# Altium PCB PCB.PcbDoc
Units mil, origin at the board's own origin, x right, y up, seen from the top; angles counter-clockwise.
Board outline 2040 x 3575 mil, 2 copper layers (Top Layer, Bottom Layer); 45 components, 27 nets, 117 pads, 0 vias.
Unrouted connection lines stored in the file: 90.
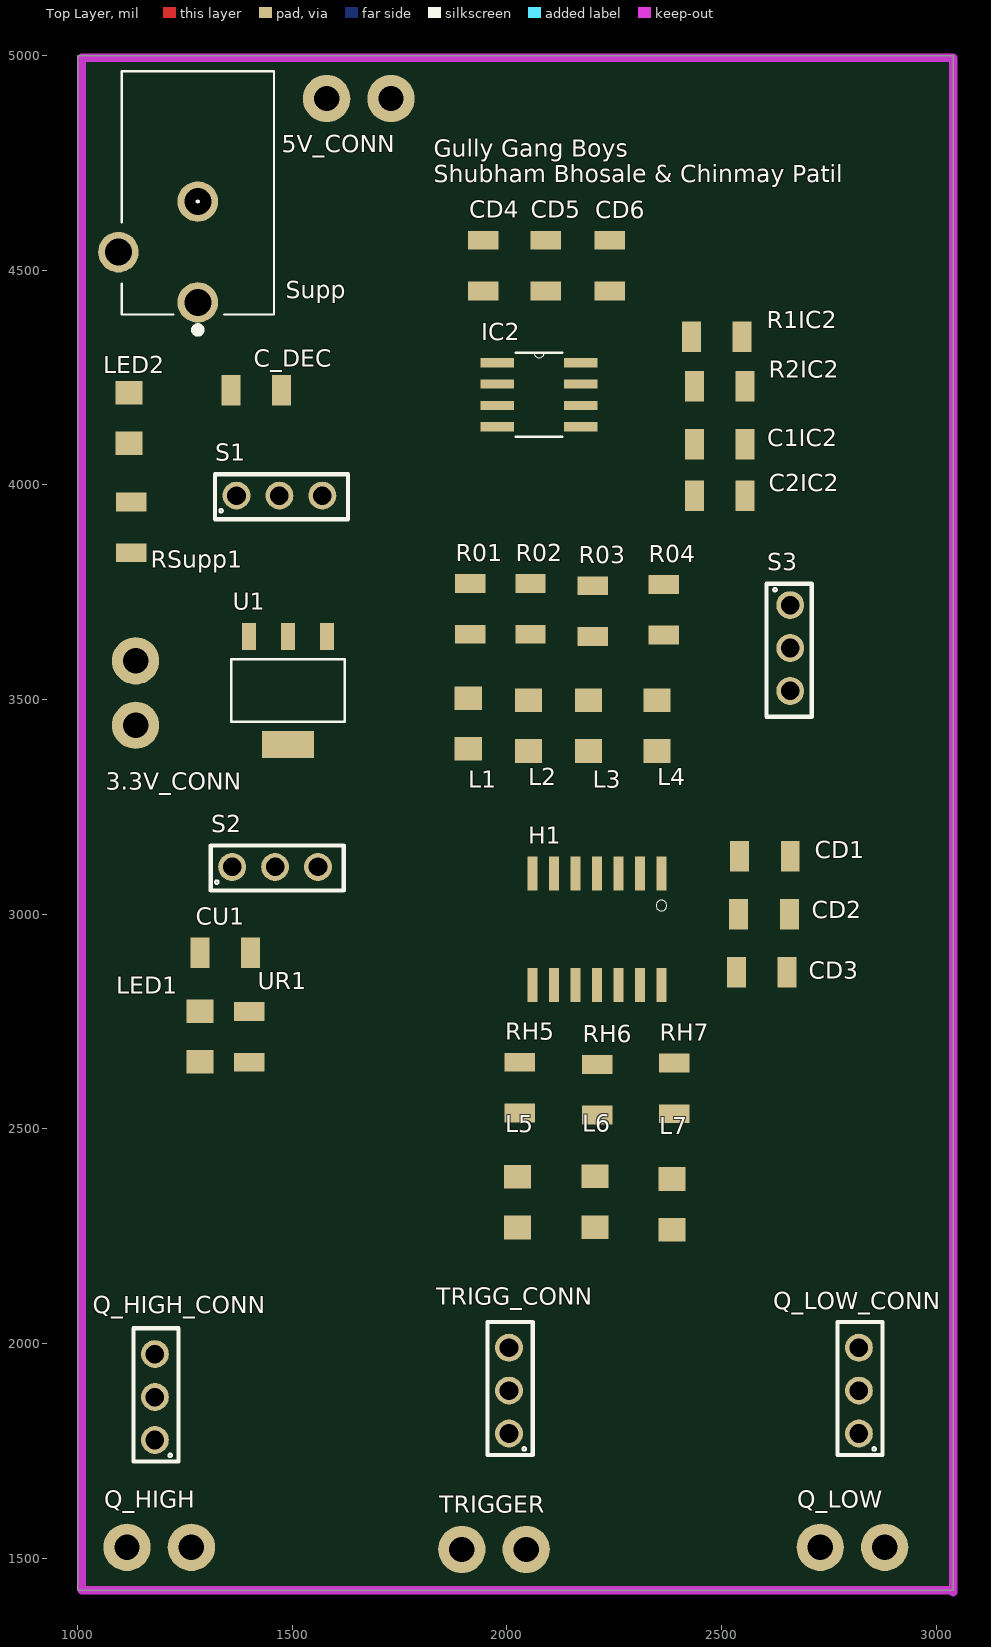
[diagram p0: Top Layer view]
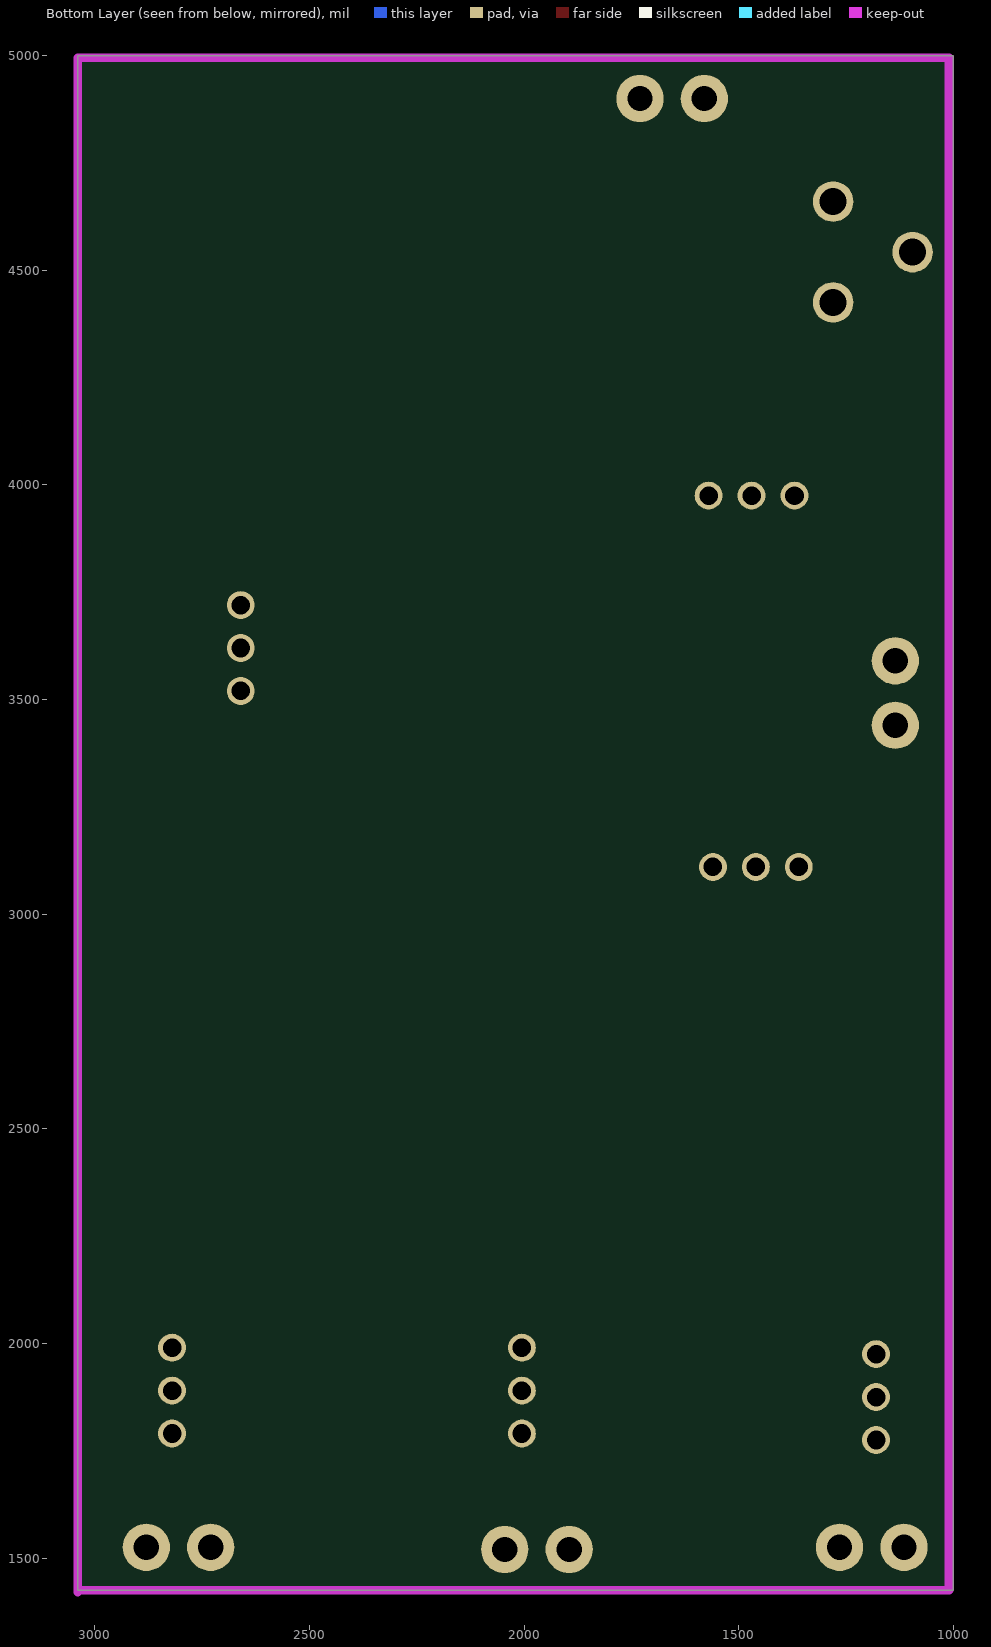
[diagram p1: Bottom Layer view, seen from below]

## Layer stack, top to bottom
Top Solder: solder mask 0.4, Solder Resist, Dk 3.5
Top Layer: signal copper 1.4
Dielectric 1: dielectric 12.6, FR-4, Dk 4.8
Bottom Layer: signal copper 1.4
Bottom Solder: solder mask 0.4, Solder Resist, Dk 3.5

## Board outline
1000,1425 3040,1425 3040,5000 1000,5000

## Design rules (kind name [scope] priority, off if disabled: settings)
Clearance [All] p1: gap=10 ignorepadtopadclearanceinfootprint=FALSE except(0: Arc-Hole Track-Hole SMDPad-Hole THPad-Hole Via-Hole Fill-Hole Poly-Hole Region-Hole Text-Hole)
PolygonConnect [All] p1: connectstyle=Relief reliefconductorwidth=10 reliefentries=4 polygonreliefangle="90 Angle" airgapwidth=10
RoutingVias [All] p1: holewidth=28 width=50 viastyle="Through Hole" minholewidth=28 minwidth=50 maxholewidth=28 maxwidth=50
SolderMaskExpansion [All] p1: expansion=4
Width [All] p1: maxlimit=10 minlimit=10 preferedwidth=10
30 further rules are at their usual default settings.

## Components (designator, comment, footprint, x,y, rotation, side; value= is the part's Value field where it differs from the comment)
3.3V_CONN "TEST PIN" TEST_PINS 1135,3590 r270 top
5V_CONN "TEST PIN" TEST_PINS 1580,4900 r0 top
C1IC2 "1uF" 1206_PASSIVE 2581,4135 r180 top
C2IC2 "22uF" 1206_PASSIVE 2411,3935 r0 top
C_DEC "22uF" 1206_PASSIVE 1501,4260 r180 top
CD1 "22uF" 1206_PASSIVE 2516,3095 r0 top
CD2 "22uF" 1206_PASSIVE 2514,2960 r0 top
CD3 "22uF" 1206_PASSIVE 2509,2825 r0 top
CD4 "22uF" 1206_PASSIVE 1985,4426 r90 top
CD5 "22uF" 1206_PASSIVE 2130,4426 r90 top
CD6 "22uF" 1206_PASSIVE 2280,4426 r90 top
CU1 "22uF" 1206_PASSIVE 1259,2870 r0 top
H1 "‎HEX INVERTER" HEX 2360,3020 r180 top value="Hex inverter"
IC2 "555 Timer" 555 2075,4210 r0 top
L1 "RED LED" LED 1910,3499 r180 top
L2 "RED LED" LED 2050,3494 r180 top
L3 "RED LED" LED 2190,3494 r180 top
L4 "RED LED" LED 2350,3494 r180 top
L5 "RED LED" LED 2025,2384 r180 top
L6 "RED LED" LED 2205,2385 r180 top
L7 "RED LED" LED 2385,2379 r180 top
LED1 "RED LED" LED 1285,2660 r0 top
LED2 "RED LED" LED 1120,4101 r0 top
Q_HIGH "TEST PIN" TEST_PINS 1265,1525 r180 top
Q_HIGH_CONN "3 pin" 3-PIN 1234.95,1725 r90 top value=3-pin
Q_LOW "TEST PIN" TEST_PINS 2880,1525 r180 top
Q_LOW_CONN "3 pin" 3-PIN 2874.95,1740 r90 top value=3-pin
R01 "10K" 1206_PASSIVE 1875,3796 r270 top
R1IC2 "1K" 1206_PASSIVE 2404,4305 r0 top
R02 "1K" 1206_PASSIVE 2095,3626 r90 top
R2IC2 "1K" 1206_PASSIVE 2581,4270 r180 top
R03 "300Ohm" 1206_PASSIVE 2160,3791 r270 top value=300
R04 "49.9Ohm" 1206_PASSIVE 2325,3794 r270 top value=49.9
RH5 "49.9Ohm" 1206_PASSIVE 1990,2681 r270 top value=49.9
RH6 "49.9Ohm" 1206_PASSIVE 2170,2676 r270 top value=49.9
RH7 "49.9Ohm" 1206_PASSIVE 2350,2679 r270 top value=49.9
RSupp1 "1K" 1206_PASSIVE 1165,3816 r90 top
S1 "3 pin male" 3-PIN 1320,3920.05 r0 top value=3-pin
S2 "3 pin male" 3-PIN 1310,3055.05 r0 top value=3-pin
S3 "3 pin male" 3-PIN 2605.05,3770 r270 top value=3-pin
Supp "Power Jack" "Power Jack" 1280,4425 r90 top
TRIGG_CONN "3 pin" 3-PIN 2059.95,1740 r90 top value=3-pin
TRIGGER "TEST PIN" TEST_PINS 2045,1520 r180 top
U1 "LDO" LDO 1425,3362.06 r0 top
UR1 "1K" 1206_PASSIVE 1440,2629 r90 top

## Footprints (in the part's own frame and the unit in brackets; to place one, negate y for a bottom-side part, rotate by r counter-clockwise, add the part's x,y. Pads: shape width x height; smd on the part's side, far side on the other; paste and mask are expansions set on the pad)
3-PIN [mm]
  round 1.65 hole 1.1: 1(1.27,1.396) 2(3.81,1.396) 3(6.35,1.396)
  silkscreen extent 0,0 7.87,2.67
555 [mil]
  rect 78x22 smd: 1(-97,75) 2(-97,25) 3(-97,-25) 4(-97,-75) 5(97,-75) 6(97,-25) 7(97,25) 8(97,75)
  silkscreen extent -54,-98 54,98
1206_PASSIVE [mil]
  rect 44x71 smd: 1(26,40) 2(144,40)
HEX [mm]
  rect 0.6x2 smd: 1(0,-1.905) 2(1.27,-1.905) 3(2.54,-1.905) 4(3.81,-1.905) 5(5.08,-1.905) 6(6.35,-1.905) 7(7.62,-1.905) 8(7.62,4.699) 9(6.35,4.699) 10(5.08,4.699) 11(3.81,4.699) 12(2.54,4.699) 13(1.27,4.699) 14(0,4.699)
  silkscreen extent -0.32,-0.32 0.32,0.32
LDO [mil]
  rect 33x63 smd: 1(156,284.94) 2(65,284.94) 3(-26,284.94)
  rect 122x63 smd: 4(65,32.94)
  silkscreen extent -67,86 197,232
LED [mil]
  rect 63x55 smd: 1(0,114) 2(0,-4)
"Power Jack" [mm]
  round 2.4 hole 1.6: 1(0,0) 2(5.969,0) 3(2.977,4.7)
  silkscreen extent -1.82,-4.5 13.68,4.5
TEST_PINS [mm]
  round 2.8 hole 1.5: 1(3.81,0) 2(0,0)

## Part data
C1IC2: library part C1206C105M4RACTU?, "CAP CER 1UF 16V X7R 1206", Component Link=https://www.digikey.com/product-detail/en/C1206C105M4RACTU/399-8150-1-ND/3471873/?itemSeq=303790193, Digikey Part=?399-8150-1-ND?
C2IC2 C_DEC CD1 CD2 CD3 CD4 CD5 CD6 CU1: library part CL31A226MOCLNNC?, "CAP CER 22UF 16V X5R 1206", Component Link=https://www.digikey.com/product-detail/en/CL31A226MOCLNNC/1276-2728-1-ND/3890814/?itemSeq=303790208, Digikey Part=?1276-2728-1-ND?
H1: library part ?SN74ALVC14NSR?, "IC INVERTER SCHMITT 6CH 14SOP", Component Link=https://www.digikey.com/product-detail/en/SN74ALVC14NSR/296-28498-1-ND/2642575/?itemSeq=303790195, Digikey Part=?296-28498-1-ND?
IC2: library part ?TLC555CDR?, "IC OSC SGL TIMER 2.1MHZ 8-SOIC", Component Link=https://www.digikey.com/product-detail/en/TLC555CDR/296-1336-1-ND/404959/?itemSeq=303790201, Digikey Part=?296-1336-1-ND?
L1 L2 L3 L4 L5 L6 L7 LED1 LED2: library part ?LTST-C150CKT, "LED RED CLEAR 1206 SMD", Component Link=https://www.digikey.com/product-detail/en/LTST-C150CKT/160-1167-1-ND/269239/?itemSeq=303790203, Digikey Part=160-1167-1-ND?
Q_HIGH_CONN Q_LOW_CONN S1 S2 S3 TRIGG_CONN: library part ?PREC003SAAN-RC?, "CONN HEADER VERT 3POS 2.54MM", Component Link=https://www.digikey.com/product-detail/en/PREC003SAAN-RC/S1012EC-03-ND/2774851/?itemSeq=303790167, Digikey Part=?S1012EC-03-ND?
R01: library part ?RNCP1206FTD10K0?, "RES 10K OHM 1% 1/2W 1206", Component Link=https://www.digikey.com/product-detail/en/RNCP1206FTD10K0/RNCP1206FTD10K0CT-ND/2240708/?itemSeq=303790164, Digikey Part=?RNCP1206FTD10K0CT-ND?
R1IC2 R02 R2IC2 RSupp1 UR1: library part ?RNCP1206FTD1K00CT-ND?, "RES 1K OHM 1% 1/2W 1206", Component Link=https://www.digikey.com/product-detail/en/RNCP1206FTD1K00/RNCP1206FTD1K00CT-ND/2240675/?itemSeq=303790179, Digkiey Part=RNCP1206FTD1K00CT-ND?
R03: library part RMCF1206JT300R?, "RES 300 OHM 5% 1/4W 1206", Component Link=https://www.digikey.com/product-detail/en/RMCF1206JT300R/RMCF1206JT300RCT-ND/1942776/?itemSeq=303790185, Digikey Part=RMCF1206JT300RCT-ND?
R04 RH5 RH6 RH7: library part RNCP1206FTD49R9?, "RES 49.9 OHM 1% 1/2W 1206", Component Link=https://www.digikey.com/product-detail/en/RNCP1206FTD49R9/RNCP1206FTD49R9CT-ND/2240649/?itemSeq=303790171, Digikey Part=RNCP1206FTD49R9CT-ND?
Supp: library part ?CP-102A-ND?, "CONN PWR JACK 2X5.5MM SOLDER", Component Link=https://www.digikey.com/product-detail/en/PJ-102A/CP-102A-ND/275425/?itemSeq=303790187, Digikey Part=CP-102A-ND?
U1: library part AZ1117CH?, "IC REG LINEAR 3.3V 800MA SOT223"

## Nets (pads, with @x,y where several pads share a name; then routed paths per layer and width w, separated by ;. In a path a pad name is that pad's centre, name@x,y a point inside that pad or via, vN(x,y) a via of type N, cw(c..) or ccw(c..) an arc to the next point about the centre after c; other vN are vias at no path point)
1Y: H1.2 Q_LOW.1 Q_LOW_CONN.2
2Y: H1.4 TRIGG_CONN.2 TRIGGER.1
3.3V: 3.3V_CONN.1 CU1.2 S2.1 S2.2 U1.2 U1.4 UR1.2
3.3V_J: CD1.1 CD2.1 CD3.1 H1.1 H1.14 S2.3
3Y: H1.6 RH7.1
4Y: H1.8 RH6.1
5V: 5V_CONN.1 C_DEC.2 CD4.1 CD5.1 CD6.1 IC2.4 IC2.8 R1IC2.2 RSupp1.1 S1.1 S1.2 Supp.1
5V_J: S1.3 U1.3
5Y: H1.10 RH5.1
6Y: H1.12 Q_HIGH.1 Q_HIGH_CONN.2
555_O/P: IC2.3 R01.1 R02.2 R03.1 R04.1
GND: 3.3V_CONN.2 5V_CONN.2 C1IC2.1 C2IC2.2 C_DEC.1 CD1.2 CD2.2 CD3.2 CD4.2 CD5.2 CD6.2 CU1.1 H1.7 H1.13 IC2.1 L1.1 L2.1 L3.1 L4.1 L5.1 L6.1 L7.1 LED1.1 LED2.1 Q_HIGH.2 Q_HIGH_CONN.1 Q_HIGH_CONN.3 Q_LOW.2 Q_LOW_CONN.1 Q_LOW_CONN.3 Supp.2 Supp.3 TRIGG_CONN.1 TRIGG_CONN.3 TRIGGER.2 U1.1
HEX_IN: H1.3 H1.5 H1.9 H1.11 S3.3
NetC2IC2_1: C2IC2.1 IC2.5
NetIC2_2: IC2.2 IC2.6
NetIC2_7: IC2.7 R1IC2.1 R2IC2.2
NetL1_2: L1.2 R01.2
NetL2_2: L2.2 R02.1
NetL3_2: L3.2 R03.2
NetL4_2: L4.2 R04.2
NetL5_2: L5.2 RH5.2
NetL6_2: L6.2 RH6.2
NetL7_2: L7.2 RH7.2
NetLED1_2: LED1.2 UR1.1
NetLED2_2: LED2.2 RSupp1.2
NetS3_1: S3.1 S3.2
THRES/TRIGG: C1IC2.2 R2IC2.1

## Keep-outs
Keep-Out Layer:
  lines w20: 1010,1425 3035,1425 3040,1420 3040,4995 1010,4995 1010,1425

## Silkscreen, mask and mechanical layers (free items; w line width, h text height)
Top Overlay:
  text "Gully Gang Boys  / Shubham Bhosale & Chinmay Patil" at 1830,4705 h40